# Altium PCB PCB1.PcbDoc
Units mm, origin at the board's own origin, x right, y up, seen from the top; angles counter-clockwise.
Board outline 40.64 x 65.6 mm, 2 copper layers (Top Layer, Bottom Layer); 64 components, 73 nets, 320 pads, 138 vias.
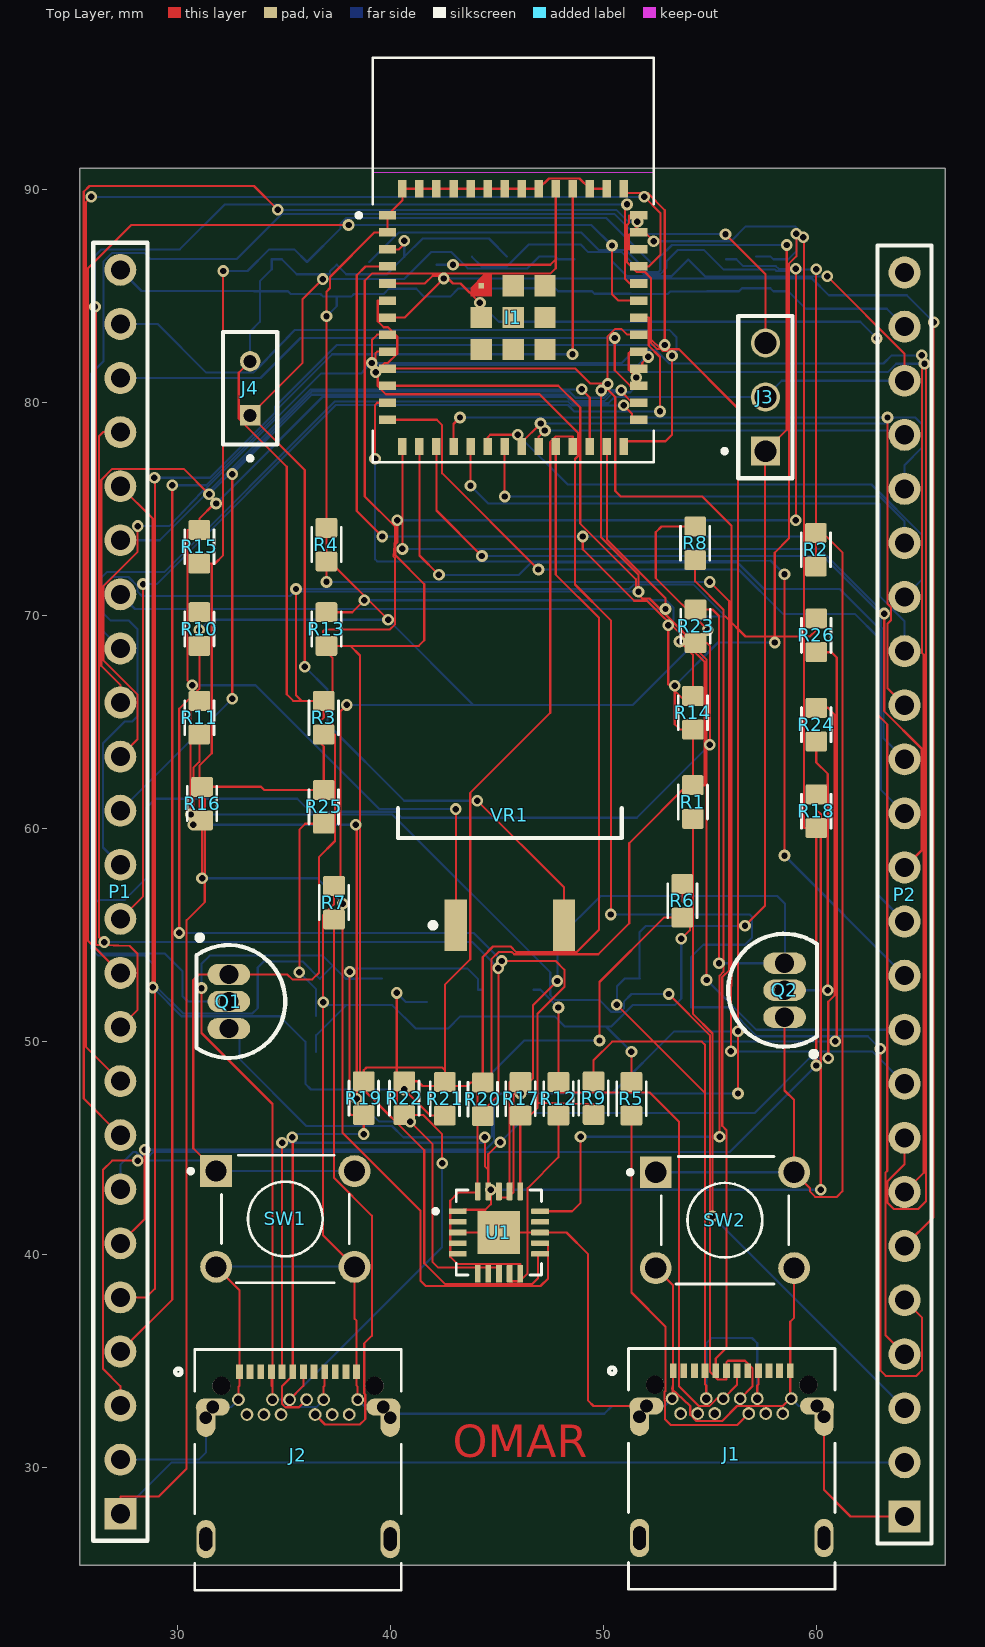
[diagram p0: Top Layer view]
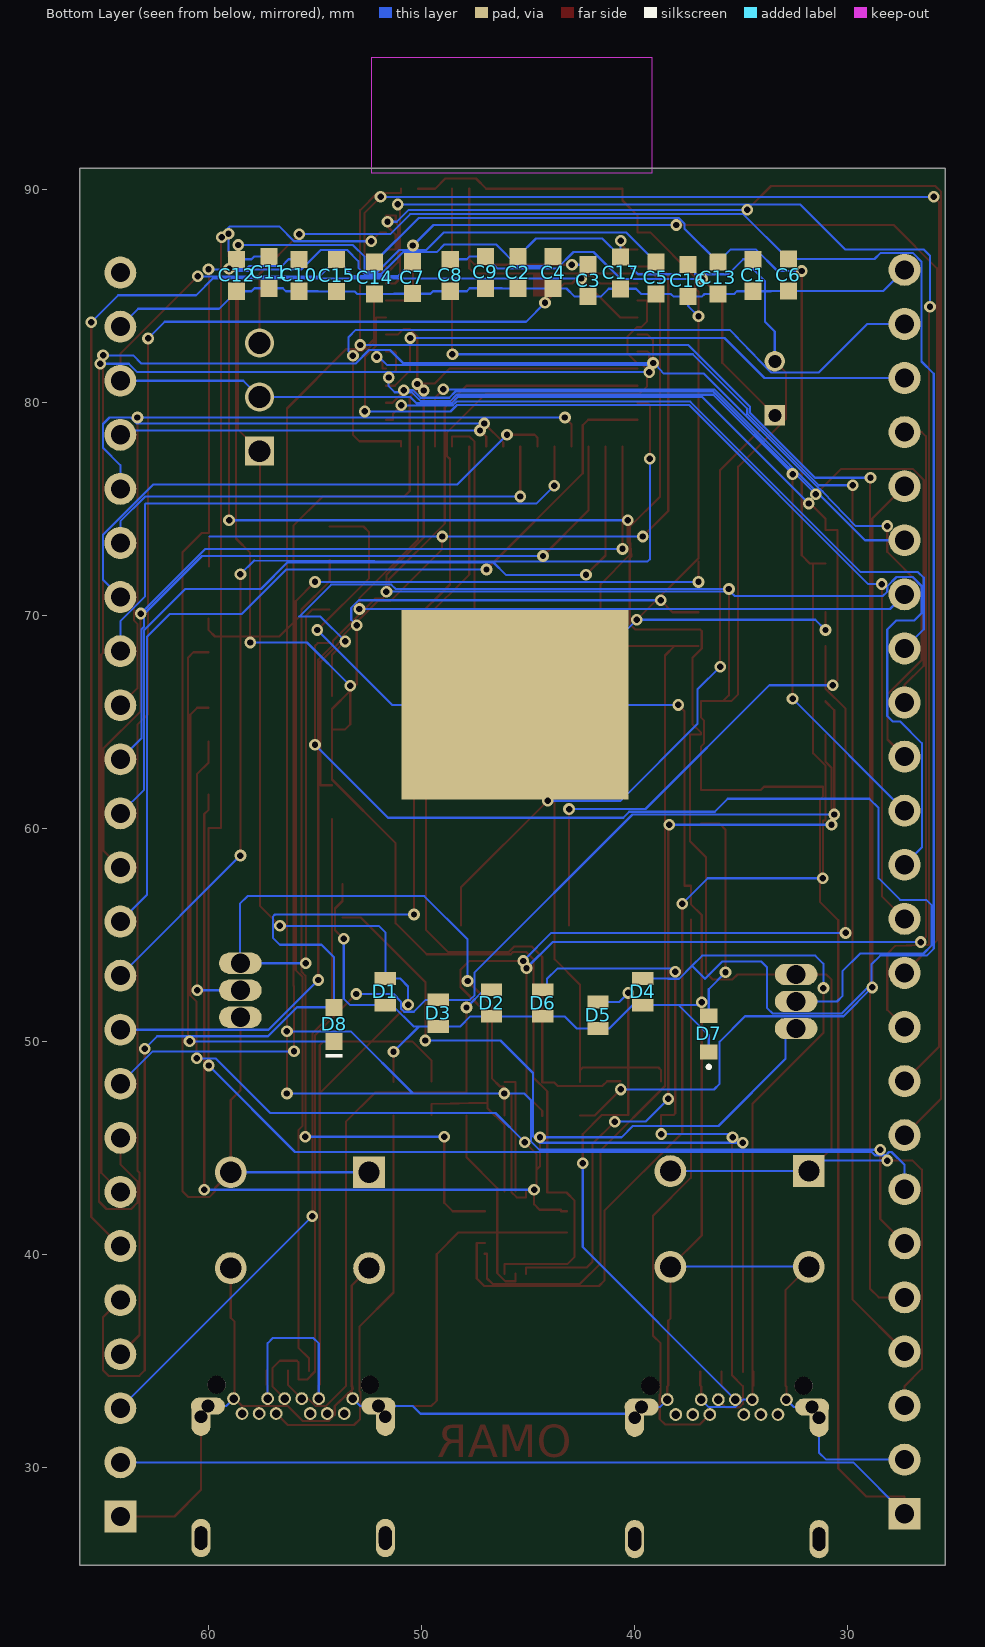
[diagram p1: Bottom Layer view, seen from below]
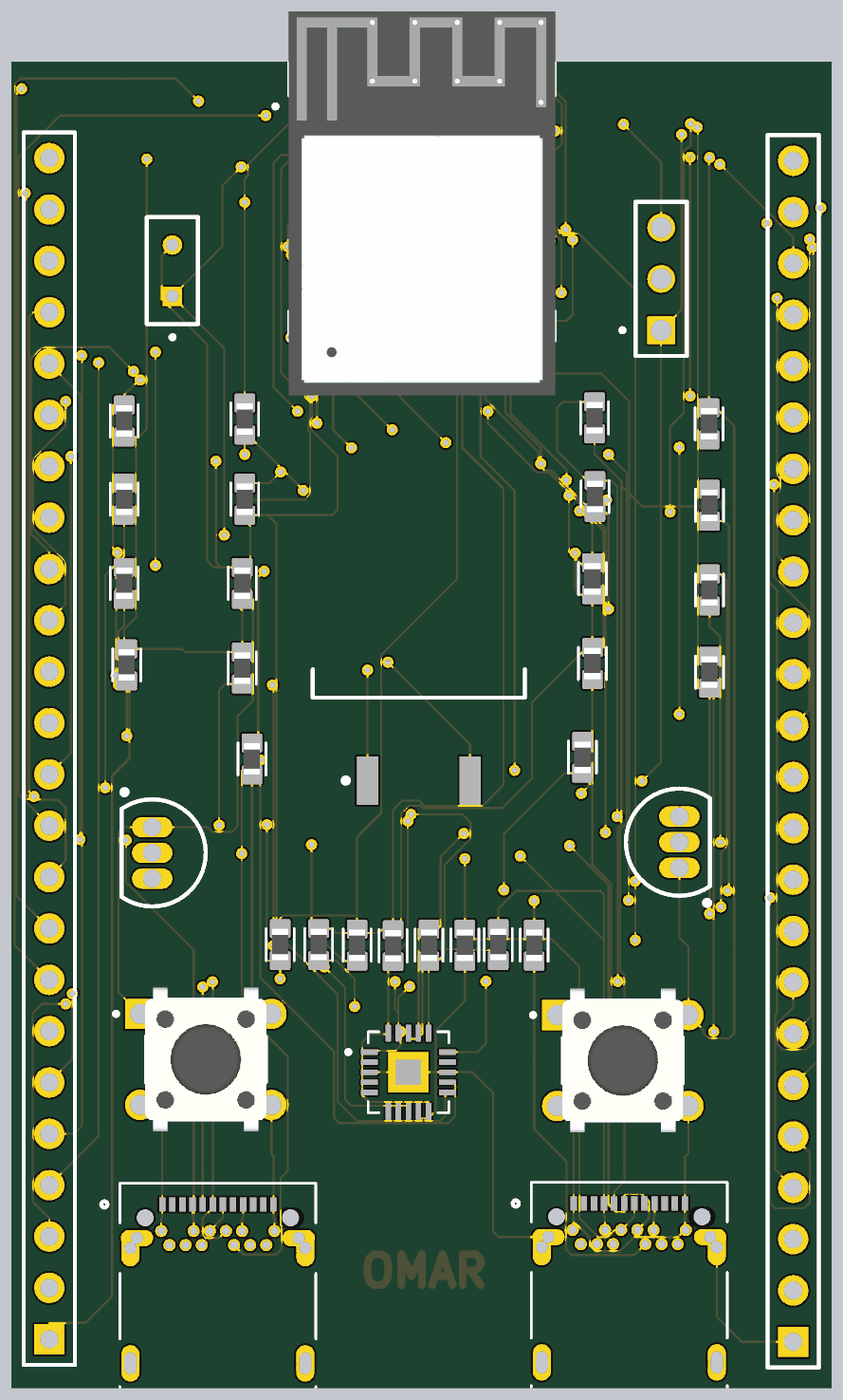
[diagram p2: 3D render of the assembled board from above, using the file's embedded part models]
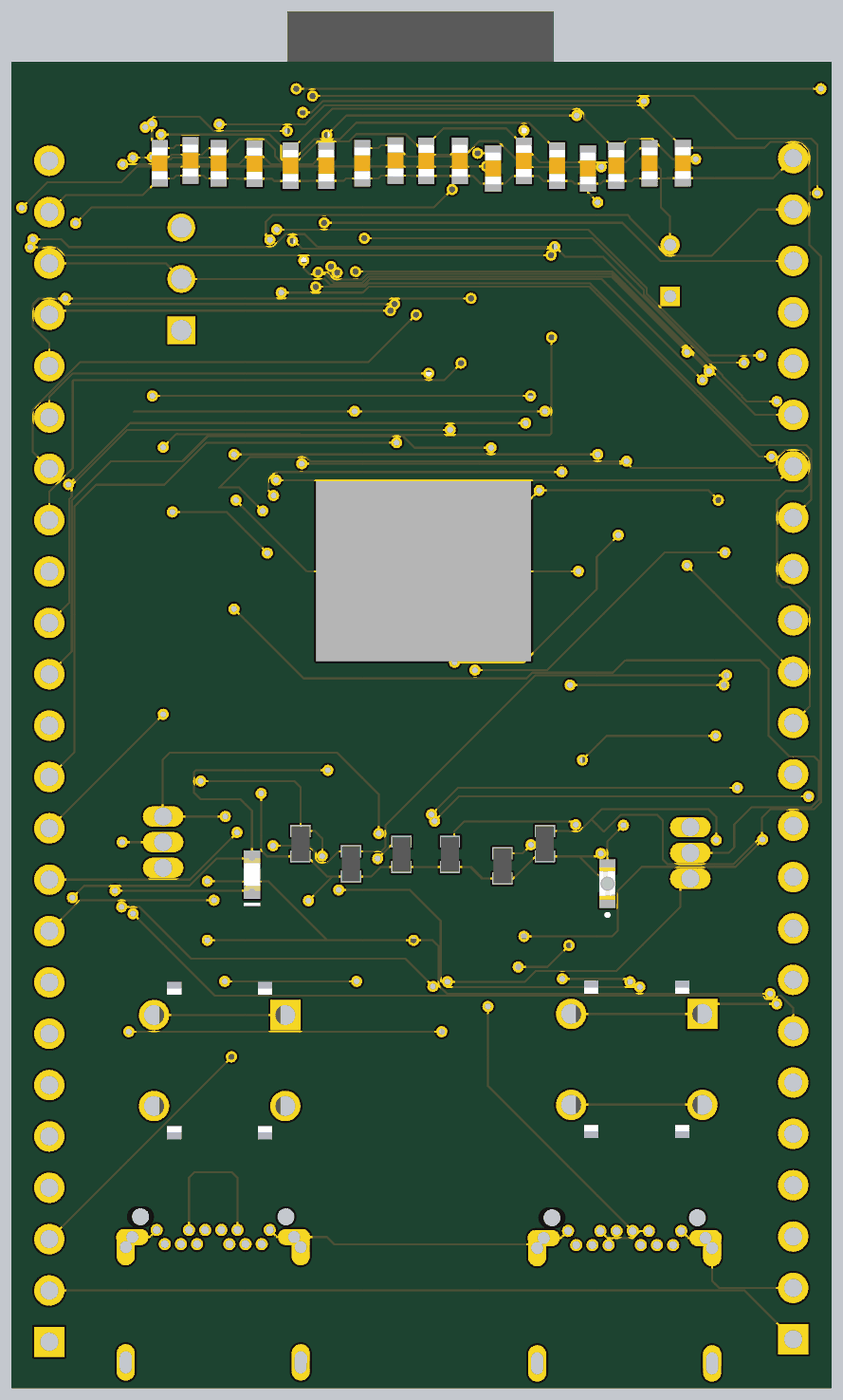
[diagram p3: 3D render of the assembled board from below, using the file's embedded part models]

## Layer stack, top to bottom
Top Solder: solder mask 0.0102, Solder Resist, Dk 3.5
Top Layer: signal copper 0.0356
Dielectric 1: dielectric 0.32, FR-4, Dk 4.8
Bottom Layer: signal copper 0.0356
Bottom Solder: solder mask 0.0102, Solder Resist, Dk 3.5

## Board outline
25.4,25.4 66.04,25.4 66.04,91 25.4,91

## Design rules (kind name [scope] priority, off if disabled: settings)
Clearance Clearance_1 [All] p1: gap=0 ignorepadtopadclearanceinfootprint=TRUE
Clearance [All] p2: gap=0 ignorepadtopadclearanceinfootprint=TRUE
Clearance Clearance_2 [All] p3: gap=0 ignorepadtopadclearanceinfootprint=TRUE
ComponentClearance [All] p1: gap=0 collisioncheckmode=3 verticalgap=0 showdistances=FALSE
DiffPairsRouting [All] p1: maxlimit=0.254 minlimit=0.05 mostfreqgap=0.05 toplayer_minwidth=0.1 toplayer_maxwidth=0.1 toplayer_prefwidth=0.1 bottomlayer_minwidth=0.1 bottomlayer_maxwidth=0.1 bottomlayer_prefwidth=0.1 maxuncoupledlength=12.7
PolygonConnect [All] p1: connectstyle=Relief reliefconductorwidth=0.254 reliefentries=4 polygonreliefangle="90 Angle" airgapwidth=0.254
RoutingCorners [All] p1: cornerstyle=Round minsetback=2 maxsetback=2
RoutingVias [All] p1: holewidth=0.3 width=0.55 viastyle="Through Hole" minholewidth=0.2 minwidth=0.5 maxholewidth=0.4 maxwidth=0.6
SolderMaskExpansion [All] p1: expansion=0.102 istentingtop=FALSE
Width [All] p1: maxlimit=0.15 minlimit=0.1 preferedwidth=0.1
27 further rules are at their usual default settings.

## Components (designator, comment, footprint, x,y, rotation, side; value= is the part's Value field where it differs from the comment)
C1 "10nF" WCAP-CSGP_0603_L1.6W0.8H0.8_Reflow 34.417,85.979 r90 bottom
C2 "100nF" WCAP-CSGP_0603_L1.6W0.8H0.8_Reflow 45.466,86.106 r90 bottom
C3 "1uF" WCAP-CSGP_0603_L1.6W0.8H0.8_Reflow 42.164,85.725 r90 bottom
C4 "100nF" WCAP-CSGP_0603_L1.6W0.8H0.8_Reflow 43.815,86.106 r90 bottom
C5 "100nF" WCAP-CSGP_0603_L1.6W0.8H0.8_Reflow 38.989,85.852 r90 bottom
C6 "100nF" WCAP-CSGP_0603_L1.6W0.8H0.8_Reflow 32.766,85.991 r90 bottom
C7 "4uF" WCAP-CSGP_0603_L1.6W0.8H0.8_Reflow 50.419,85.864 r90 bottom
C8 "10uF" WCAP-CSGP_0603_L1.6W0.8H0.8_Reflow 48.641,85.979 r90 bottom
C9 "10uF" WCAP-CSGP_0603_L1.6W0.8H0.8_Reflow 46.99,86.118 r90 bottom
C10 "100nF" WCAP-CSGP_0603_L1.6W0.8H0.8_Reflow 55.753,85.979 r90 bottom
C11 "100nF" WCAP-CSGP_0603_L1.6W0.8H0.8_Reflow 57.15,86.118 r90 bottom
C12 "100nF" WCAP-CSGP_0603_L1.6W0.8H0.8_Reflow 58.674,85.979 r90 bottom
C13 "100nF" WCAP-CSGP_0603_L1.6W0.8H0.8_Reflow 36.068,85.852 r90 bottom
C14 "4uF" WCAP-CSGP_0603_L1.6W0.8H0.8_Reflow 52.197,85.852 r90 bottom
C15 "100nF" WCAP-CSGP_0603_L1.6W0.8H0.8_Reflow 53.975,85.967 r90 bottom
C16 "100nF" WCAP-CSGP_0603_L1.6W0.8H0.8_Reflow 37.465,85.725 r90 bottom
C17 "100nF" WCAP-CSGP_0603_L1.6W0.8H0.8_Reflow 40.64,86.094 r90 bottom
D1 "TESDU12VRGG" DIO_TESDU12VRGG 51.7,52.325 r90 bottom
D2 "TESDU12VRGG" DIO_TESDU12VRGG 46.7,51.8 r90 bottom
D3 "TESDU12VRGG" DIO_TESDU12VRGG 49.2,51.325 r90 bottom
D4 "TESDU12VRGG" DIO_TESDU12VRGG 39.6,52.325 r90 bottom
D5 "TESDU12VRGG" DIO_TESDU12VRGG 41.7,51.225 r90 bottom
D6 "TESDU12VRGG" DIO_TESDU12VRGG 44.3,51.8 r90 bottom
D7 "Green" WL-SMCW_0603_150060xx83000 36.5,50.35 r90 bottom
D8 "Red" WL-SMCW_0603_150060xx75003 54.1,50.8 r90 bottom
I1 "IC" XCVR_ESP32-MINI-1-N4 45.752,83.993 r0 top
J1 "UJ31-CH-31N-SMT-TR" CUI_UJ31-CH-31N-SMT-TR 53.269,34.53 r0 top
J2 "UJ31-CH-31N-SMT-TR" CUI_UJ31-CH-31N-SMT-TR 32.9,34.482 r0 top
J3 "TSW-101-23-S-T" SAMTEC_TSW-101-23-S-T 57.6,77.72 r0 top
J4 "BBL-102-G-E" SAMTEC_BBL-102-G-E 33.4,79.4 r90 top
P1 "Header 24" HDR1X24 27.305,27.813 r90 top
P2 "Header 24" HDR1X24 64.135,27.686 r90 top
Q1 "NPN" TO-226-AA 32.4,51.87 r180 top
Q2 "NPN" TO-226-AA 58.5,52.4 r0 top
R1 "27R" RESC1608X50N_CPF0603F10KC1 54.194,61.238 r270 top
R2 "27R" RESC1608X50N_CPF0603F10KC1 59.969,73.09 r90 top
R3 "10K" RESC1608X50N_CPF0603F10KC1 36.857,65.202 r90 top
R4 "5K" RESC1608X50N_CPF0603F10KC1 36.984,73.33 r90 top
R5 "5K" RESC1608X50N_CPF0603F10KC1 51.308,47.306 r90 top
R6 "5K" RESC1608X50N_CPF0603F10KC1 53.7,56.6 r90 top
R7 "5K" RESC1608X50N_CPF0603F10KC1 37.338,56.515 r90 top
R8 "10K" RESC1608X50N_CPF0603F10KC1 54.3,73.39 r90 top
R9 "4K" RESC1608X50N_CPF0603F10KC1 49.53,47.334 r90 top
R10 "10K" RESC1608X50N_CPF0603F10KC1 31.015,69.365 r90 top
R11 "27R" RESC1608X50N_CPF0603F10KC1 31.015,65.202 r90 top
R12 "27R" RESC1608X50N_CPF0603F10KC1 47.879,47.306 r90 top
R13 "0R" RESC1608X50N_CPF0603F10KC1 36.984,69.365 r90 top
R14 "0R" RESC1608X50N_CPF0603F10KC1 54.194,65.429 r90 top
R15 "0R" RESC1608X50N_CPF0603F10KC1 31.015,73.231 r90 top
R16 "0R" RESC1608X50N_CPF0603F10KC1 31.142,61.166 r90 top
R17 "0R" RESC1608X50N_CPF0603F10KC1 46.101,47.306 r90 top
R18 "0R" RESC1608X50N_CPF0603F10KC1 59.99,60.811 r90 top
R19 "0R" RESC1608X50N_CPF0603F10KC1 38.735,47.334 r90 top
R20 "0R" RESC1608X50N_CPF0603F10KC1 44.323,47.278 r90 top
R21 "0R" RESC1608X50N_CPF0603F10KC1 42.545,47.306 r90 top
R22 "0R" RESC1608X50N_CPF0603F10KC1 40.64,47.334 r90 top
R23 "10K" RESC1608X50N_CPF0603F10KC1 54.321,69.493 r90 top
R24 "10K" RESC1608X50N_CPF0603F10KC1 59.99,64.875 r90 top
R25 "10K" RESC1608X50N_CPF0603F10KC1 36.857,61.011 r90 top
R26 "1K" RESC1608X50N_CPF0603F10KC1 59.99,69.066 r90 top
SW1 "1825910-6" SW_1825910-6-4 35.052,41.656 r0 top
SW2 "1825910-6" SW_1825910-6-4 55.7,41.6 r0 top
U1 "FT231XQ-R" QFN50P400X400X80-21N 45.085,41.021 r0 top
VR1 "Volt Reg" D2PAK_N 45.6,62.25 r90 top

## Footprints (in the part's own frame and the unit in brackets; to place one, negate y for a bottom-side part, rotate by r counter-clockwise, add the part's x,y. Pads: shape width x height; smd on the part's side, far side on the other; paste and mask are expansions set on the pad)
CUI_UJ31-CH-31N-SMT-TR [mm]
  rect 0.32x0.7 smd: A1(0,0) A2(0.5,0) A3(1,0) A4(1.5,0) A5(2,0) A6(2.5,0) A7(3,0) A8(3.5,0) A9(4,0) A10(4.5,0) A11(5,0) A12(5.5,0)
  round 0.6 hole 0.4: B1(5.55,-1.31) B2(5.15,-2.01) B3(4.35,-2.01) B4(3.95,-1.31) B5(3.55,-2.01) B6(3.15,-1.31) B7(2.35,-1.31) B8(1.95,-2.01) B9(1.55,-1.31) B10(1.15,-2.01) B11(0.35,-2.01) B12(-0.05,-1.31)
  oval 1.6x0.8 hole 0.6: SH1(-1.255,-1.66) SH2(6.755,-1.66)
  oval 0.9x1.8 hole 0.6: SH3(-1.58,-2.16) SH4(7.08,-2.16)
  oval 0.9x1.8 hole 0.6 slot 1.1 at 90 deg: SH5(-1.58,-7.86) SH6(7.08,-7.86)
  round 0.85 hole 0.85 unplated: ""(-0.85,-0.66) ""(6.35,-0.66)
  silkscreen extent -3.02,-10.26 7.6,1.04
D2PAK_N [mm] "D2-PAK, 4-Leads, Body 8.8x10.4mm, Pitch 2.54mm, Lead Span 15.1mm, IPC Medium Density"
  rect 2.4x1.05 smd: 1(-6.8,2.54) 3(-6.8,-2.54)
  rect 8.9x10.65 smd far side: 2(3.55,0)
  silkscreen extent -6.92,-5.25 -1.3,5.25, body extent -2.7,-5.28 6.3,5.28, height 4.69
DIO_TESDU12VRGG [mm]
  rect 0.6x1 smd: 1(-0.625,0) 2(0.625,0)
  body extent -0.85,-0.45 0.85,0.45, height 0.85
HDR1X24 [mm] "Connector; Header; 24 Position"
  rect 1.5x1.5 hole 0.9: 1(0,0)
  round 1.5 hole 0.9: 2(2.54,0) 3(5.08,0) 4(7.62,0) 5(10.16,0) 6(12.7,0) 7(15.24,0) 8(17.78,0) 9(20.32,0) 10(22.86,0) 11(25.4,0) 12(27.94,0) 13(30.48,0) 14(33.02,0) 15(35.56,0) 16(38.1,0) 17(40.64,0) 18(43.18,0) 19(45.72,0) 20(48.26,0) 21(50.8,0) 22(53.34,0) 23(55.88,0) 24(58.42,0)
  silkscreen extent -1.27,-1.27 59.69,1.27
QFN50P400X400X80-21N [mm]
  rrect25% 0.84x0.27 smd: 1(-1.935,1) 2(-1.935,0.5) 3(-1.935,0) 4(-1.935,-0.5) 5(-1.935,-1) 11(1.935,-1) 12(1.935,-0.5) 13(1.935,0) 14(1.935,0.5) 15(1.935,1)
  rrect25% 0.27x0.84 smd: 6(-1,-1.935) 7(-0.5,-1.935) 8(0,-1.935) 9(0.5,-1.935) 10(1,-1.935) 16(1,1.935) 17(0.5,1.935) 18(0,1.935) 19(-0.5,1.935) 20(-1,1.935)
  rect 2x2 smd paste-0.37: 21(0,0)
  silkscreen extent -3.07,-2 2,2
RESC1608X50N_CPF0603F10KC1 [mm]
  rrect20% 0.94x1.02 smd: 1(-0.79,0) 2(0.79,0)
  silkscreen extent -0.8,-0.69 0.8,0.69, body extent -0.77,-0.4 0.77,0.4, height 0.55
SAMTEC_BBL-102-G-E [mm]
  rect 0.96x0.96 hole 0.61: 01(0,0)
  round 0.96 hole 0.61: 02(2.54,0)
  silkscreen extent -2.12,-1.27 3.91,1.27
SAMTEC_TSW-101-23-S-T [mm]
  rect 1.37x1.37 hole 1.02: 01(0,0)
  round 1.37 hole 1.02: 02(0,2.54) 03(0,5.08)
  silkscreen extent -2.02,-1.27 1.27,6.35
SW_1825910-6-4 [mm]
  rect 1.498x1.498 / inner round 1.498 / far side rect 1.498x1.498 hole 0.99: 1(-3.25,2.25)
  round 1.498 hole 0.99: 2(3.25,2.25) 3(-3.25,-2.25) 4(3.25,-2.25)
  silkscreen extent -4.54,-3 3,3, body extent -3,-3.9 3,3.9, height 5.01
TO-226-AA [mm] "TO, Flat Index; 3 In-Line, Axial Leads; Body Dia. 4.8mm; Leads 0.55 x 0.51 mm (max)"
  oval 2x1 hole 0.9: 1(0,-1.27) 2(0,0) 3(0,1.27)
  silkscreen extent -2.65,-3.13 1.52,2.65, body extent -2.65,-2.66 1.52,2.66, height 5.33
WCAP-CSGP_0603_L1.6W0.8H0.8_Reflow [mm] "Ceramic Capacitors, body 1.6x0.8mm"
  rect 0.8x0.8 smd: 1(-0.75,0) 2(0.75,0)
  body extent -0.8,-0.4 0.8,0.4, height 0.8
WL-SMCW_0603_150060xx75003 [mm] "SMD Mono-color Chip LED, body 1.6x0.8mm"
  rect 0.8x0.8 smd: 1(-0.8,0) 2(0.8,0)
  silkscreen extent -1.55,-0.4 -1.4,0.4, body extent -0.8,-0.4 0.8,0.4, height 0.7
WL-SMCW_0603_150060xx83000 [mm] "LED, SMT, 2-leads, body 1.60 x 0.80 mm"
  rect 0.7x0.8 smd: 1(-0.85,0) 2(0.85,0)
  silkscreen extent -1.62,-0.07 -1.48,0.08, body extent -0.8,-0.4 0.8,0.4, height 0.95
XCVR_ESP32-MINI-1-N4 [mm]
  rect 0.8x0.4 smd: 1(-5.9,4.8) 2(-5.9,4) 3(-5.9,3.2) 4(-5.9,2.4) 5(-5.9,1.6) 6(-5.9,0.8) 7(-5.9,0) 8(-5.9,-0.8) 9(-5.9,-1.6) 10(-5.9,-2.4) 11(-5.9,-3.2) 12(-5.9,-4) 13(-5.9,-4.8) 28(5.9,-4.8) 29(5.9,-4) 30(5.9,-3.2) 31(5.9,-2.4) 32(5.9,-1.6) 33(5.9,-0.8) 34(5.9,0) 35(5.9,0.8) 36(5.9,1.6) 37(5.9,2.4) 38(5.9,3.2) 39(5.9,4) 40(5.9,4.8)
  rect 0.4x0.8 smd: 14(-5.2,-6.05) 15(-4.4,-6.05) 16(-3.6,-6.05) 17(-2.8,-6.05) 18(-2,-6.05) 19(-1.2,-6.05) 20(-0.4,-6.05) 21(0.4,-6.05) 22(1.2,-6.05) 23(2,-6.05) 24(2.8,-6.05) 25(3.6,-6.05) 26(4.4,-6.05) 27(5.2,-6.05) 41(5.2,6.05) 42(4.4,6.05) 43(3.6,6.05) 44(2.8,6.05) 45(2,6.05) 46(1.2,6.05) 47(0.4,6.05) 48(-0.4,6.05) 49(-1.2,6.05) 50(-2,6.05) 51(-2.8,6.05) 52(-3.6,6.05) 53(-4.4,6.05) 54(-5.2,6.05)
  rect 0.25x0.25 smd paste-1 mask+0: 55_1(-1.5,1.5)
  rect 1x1 smd: 55_2(0,1.5) 55_3(1.5,1.5) 55_4(-1.5,0) 55_5(0,0) 55_6(1.5,0) 55_7(-1.5,-1.5) 55_8(0,-1.5) 55_9(1.5,-1.5)
  Top Layer region: -1,1 -2,1 -2,1.4 -1.4,2 -1,2
  Keep-Out Layer region: 6.6,6.8 -6.6,6.8 -6.6,12.2 6.6,12.2
  silkscreen extent -7.35,-6.8 6.6,12.2, body extent -6.6,-9.5 6.6,9.5, height 2.55

## Part data
C1 C2 C3 C4 C5 C6 C7 C8 C9 C10 C11 C12 C13 C14 C15 C16 C17: library part 885012106029, "WCAP-CSGP Multilayer Ceramic Chip Capacitor, General Purpose, size 0603, X5R, 2.2μF, 16V", Capacitance=2.2μF, Capacitance Tolerance=+/-10%, Case/Size Code=0603, Insulation Resistance=0.05GΩ, Manufacturer="Wurth Elektronik", Max Operating Temperature=85°C, Min Operating Temperature=-55°C, Rated Voltage (DC)=16V, Category="Multilayer Ceramic Chip Capacitors", Ceramic Type=X5R, ComponentLink1Description="Website Link", ComponentLink1URL=https://www.we-online.com/redexpert/article/885012106029?ad, ComponentLink2Description="Datasheet Link", ComponentLink2URL=https://www.we-online.com/redexpert/spec/885012106029?ad, Dissipation Factor=10%, Height=0.8mm, Length=1.6mm, Manufacturer Part Number=885012106029, Match Code=WCAP-CSGP, Mount="Surface Mount", Packaging="Tape and Reel", Technical Reference=X5R0603225K016DFCT10000, Width=0.8mm
D1 D2 D3 D4 D5 D6: "33V Clamp 5A Ipp Tvs Diode Surface Mount 0603", Package="0603 Taiwan Semiconductor", Check_prices=https://www.snapeda.com/parts/TESDU12VRGG/taiwan/view-part/?ref=eda, MF="Taiwan Semiconductor", MP=TESDU12VRGG, SnapEDA_Link=https://www.snapeda.com/parts/TESDU12VRGG/taiwan/view-part/?ref=snap
D7: library part 150060GS83000, "WL-SMCW Mono-color Chip LED Waterclear, SMT, size 0603, Green, 3.3V, 30°", Case/Size Code=0603, Forward Voltage=3.3V, Manufacturer="Wurth Elektronik", Operating Temperature Max=85°C, Operating Temperature Min=-40°C, Category="Signal LEDs", Chip Technology=InGaN, ComponentLink1Description="Website Link", ComponentLink1URL=https://www.we-online.com/redexpert/article/150060GS83000?ad, ComponentLink2Description="Datasheet Link", ComponentLink2URL=https://www.we-online.com/redexpert/spec/150060GS83000?ad, Dominant Wavelength=525nm, Emitting Color=Green, Height=0.95mm, Length=1.6mm, Luminous Intensity=4500mcd, Manufacturer Part Number=150060GS83000, Match Code=WL-SMCW, Mount="Surface Mount", Packaging="Tape and Reel", Peak Wavelength=520nm, Viewing Angle=30°, Width=0.8mm
D8: library part 150060RS75003, "WL-SMCW Mono-color Chip LED Waterclear, SMT, size 0603, Red, 2V, 140°", Case/Size Code=0603, Forward Voltage=2V, Manufacturer="Wurth Elektronik", Operating Temperature Max=100°C, Operating Temperature Min=-40°C, Category="Signal LEDs", Chip Technology=AlInGaP, ComponentLink1Description="Website Link", ComponentLink1URL=https://www.we-online.com/redexpert/article/150060RS75003?ad, ComponentLink2Description="Datasheet Link", ComponentLink2URL=https://www.we-online.com/redexpert/spec/150060RS75003?ad, Dominant Wavelength=625nm, Emitting Color=Red, Height=0.7mm, Length=1.6mm, Luminous Intensity=530mcd, Manufacturer Part Number=150060RS75003, Match Code=WL-SMCW, Mount="Surface Mount", Packaging="Tape and Reel", Peak Wavelength=630nm, Viewing Angle=140°, Width=0.8mm
I1: library part Component_1
J1 J2: "Type C, USB 3.1 Gen 2, 5 A, Right Angle, Surface Mount (SMT), USB Receptacle", Package=None, Availability="In Stock", Check_prices=https://www.snapeda.com/parts/UJ31-CH-31N-SMT-TR/CUI+Devices/view-part/?ref=eda, CUI_purchase_URL=https://www.cuidevices.com/product/interconnect/connectors/usb-connectors/uj31-ch-smt-series?utm_source=snapeda.com&utm_medium=referral&utm_campaign=snapedaBOM, MF="CUI Devices", MP=UJ31-CH-31N-SMT-TR, Price=None, Purchase-URL=https://pricing.snapeda.com/search/part/UJ31-CH-31N-SMT-TR/?ref=eda, SnapEDA_Link=https://www.snapeda.com/parts/UJ31-CH-31N-SMT-TR/CUI+Devices/view-part/?ref=snap
J3 J4: Package=None, Availability=Unavailable, Price=None
  J3: MP=TSW-101-23-S-T
  J4: MP=BBL-102-G-E
P1 P2: "Header, 24-Pin", LatestRevisionDate=17-Jul-2002, LatestRevisionNote="Re-released for DXP Platform.", Publisher="Altium Limited"
Q1 Q2: "NPN Bipolar Transistor", Code_JEDEC=TO-226-AA, LatestRevisionDate=17-Jul-2002, LatestRevisionNote="Re-released for DXP Platform.", PackageDescription="TO, Flat Index; 3 In-Line, Axial Leads; Body Dia. 4.8mm; Leads 0.55 x 0.51 mm (max)", PackageReference=TO-226-AA, Published=8-Jun-2000, Publisher="Altium Limited"
R1 R2 R4 R5 R6 R7 R9 R11 R12 R13 R14 R15 R16 R17 R18 R19 R20 R21 R22 R26: library part CPF0603F10KC1, "Res Thin Film 0603 10K Ohm 1% 1/16W Â±50ppm/Â°C Molded SMD SMD Paper T/R", Package=0603, Power_Rating=".063 W", Resistance=10K, Tolerance=1%, Voltage_Rating="50 V", Availability="In Stock", Check_prices=https://www.snapeda.com/parts/CPF0603F10KC1/TE+Connectivity+Passive+Product/view-part/?ref=eda, EU_RoHS_Compliance=Compliant, MF="TE Connectivity", MP=CPF0603F10KC1, Price=None, Purchase-URL=https://pricing.snapeda.com/search/part/CPF0603F10KC1/?ref=eda, SnapEDA_Link=https://www.snapeda.com/parts/CPF0603F10KC1/TE+Connectivity+Passive+Product/view-part/?ref=snap
R3 R8 R10 R23 R24 R25: library part CPF0603F10KC1, "Res Thin Film 0603 10K Ohm 1% 1/16W Â±50ppm/Â°C Molded SMD SMD Paper T/R", Package=0603, Power_Rating=".063 W", Tolerance=1%, Voltage_Rating="50 V", Availability="In Stock", Check_prices=https://www.snapeda.com/parts/CPF0603F10KC1/TE+Connectivity+Passive+Product/view-part/?ref=eda, EU_RoHS_Compliance=Compliant, MF="TE Connectivity", MP=CPF0603F10KC1, Price=None, Purchase-URL=https://pricing.snapeda.com/search/part/CPF0603F10KC1/?ref=eda, Resistance=10K, SnapEDA_Link=https://www.snapeda.com/parts/CPF0603F10KC1/TE+Connectivity+Passive+Product/view-part/?ref=snap
SW1 SW2: "Switch Push Button OFF (ON) SPST Round Button 0.05A 24VDC Momentary Contact PC Pins Thru-Hole", Package=None, Check_prices=https://www.snapeda.com/parts/1825910-6/TE+Connectivity+ALCOSWITCH+Switches/view-part/?ref=eda, Digi-Key_Part_Number=450-1650-ND, MF="TE Connectivity", MP=1825910-6, Purchase-URL=https://pricing.snapeda.com/search/part/1825910-6/?ref=eda, SnapEDA_Link=https://www.snapeda.com/parts/1825910-6/TE+Connectivity+ALCOSWITCH+Switches/view-part/?ref=snap
U1: "USB2.0 Full Speed IC offers a compact bridge to full handshake UART Interface", Package=None, Availability=Unavailable, MP=FT231XQ-R, Price=None
VR1: "Voltage Regulator", LatestRevisionDate=29-May-2009, LatestRevisionNote="IPC-7351 Footprint Added.", PackageDescription="3-Pin Transistor Outline Package 2.54 mm Pitch, 15.1 mm Lead Span", PackageReference=D2PAK, Published=24-Mar-1999, Publisher="Altium Limited"

## Via types
v1: diameter 0.55, hole 0.3, Top Layer to Bottom Layer, 138 vias

## Nets (pads, with @x,y where several pads share a name; then routed paths per layer and width w, separated by ;. In a path a pad name is that pad's centre, name@x,y a point inside that pad or via, vN(x,y) a via of type N, cw(c..) or ccw(c..) an arc to the next point about the centre after c; other vN are vias at no path point)
+3V3: C1.2 C2.2 C16.2 C17.2 I1.3 J4.02 P1.1 P2.2 R3.2 R14.2 R16.2 R25.2 R26.2 | length 160.3
  Top Layer w0.1: P1.1 27.305,28.626 29.108,28.626 30.418,29.936 30.418,55.691 31.267,56.54 31.267,61.368 31.142,61.493 R16.2 33.909,61.956 34.064,61.801 R25.2 36.857,63.856 36.728,63.984 36.728,65.075 36.857,65.203 R3.2 35.814,65.992 ; J4.02 32.868,81.408 32.868,79.248 35.123,76.993 35.123,66.294 35.425,65.992 35.814,65.992 ; v1(35.554,71.247) 35.554,66.252 35.814,65.992 ; I1.3 40.386,87.193 40.64,87.447 v1(40.64,87.605) ; v1(53.569,68.783) 54.194,68.158 R14.2 ; 55.733,69.946 56.667,69.012 59.69,69.012 59.99,69.312 R26.2
  Bottom Layer w0.1: P1.1 29.718,30.226 P2.2 ; J4.02 33.4,83.336 33.858,83.795 33.858,85.7 34.417,86.258 C1.2 34.886,86.729 35.585,86.03 37.15,86.03 37.15,86.16 C16.2 37.91,86.03 39.826,86.03 C17.2 ; v1(35.554,71.247) 51.206,71.247 51.41,71.45 54.229,71.45 55.733,69.946 54.732,69.946 v1(53.569,68.783) ; v1(40.64,87.605) C17.2 ; C2.2 44.616,87.706 41.502,87.706 C17.2
"+3V3 REG": C8.2 C9.2 J4.01 VR1.3 | length 52.8
  Top Layer w0.1: v1(35.966,67.589) 35.966,76.834 J4.01 35.865,81.865 35.865,84.861 v1(36.805,85.801) ; v1(44.069,61.3) 48.14,57.229 VR1.3
  Bottom Layer w0.1: v1(35.966,67.589) 37.033,66.523 37.033,64.907 40.64,61.3 v1(44.069,61.3) ; v1(36.805,85.801) 40.64,85.801 41.91,87.071 42.853,87.071 43.618,86.306 46.428,86.306 C9.2 47.727,86.868 47.866,86.729 C8.2
+5V: C7.2 C15.2 J3.02 P2.22 R15.2 VR1.1 | length 82.2
  Top Layer w0.1: v1(30.683,66.726) 30.455,66.954 30.455,74.021 R15.2 31.015,74.549 31.726,75.26 v1(31.801,75.26) ; VR1.1 v1(43.06,60.909) ; v1(60.503,85.928) 64.135,82.296 P2.22
  Bottom Layer w0.1: v1(30.683,66.726) 33.655,66.726 39.472,60.909 v1(43.06,60.909) ; v1(31.801,75.26) 36.801,80.26 48.282,80.26 48.573,79.969 50.226,79.969 50.517,80.26 J3.02 58.366,81.026 P2.22 ; C7.2 51.102,85.931 53.189,85.931 C15.2 54.764,85.928 v1(60.503,85.928)
"+5V VBUS1": C5.2 D1.2 J1.A4 J1.A9 J1.B4 J1.B9 J3.01 R9.2 | length 102.3
  Top Layer w0.1: R9.2 49.53,49.108 50.41,49.987 52.349,49.987 ; v1(50.622,51.714) 52.349,49.987 ; J1.B9 54.819,33.833 54.769,33.883 J1.A4 54.769,47.568 ; v1(56.642,55.423) 57.582,56.363 57.582,77.72 J3.01 58.605,78.725 v1(58.605,87.401) ; J1.B4 57.219,33.833 57.269,33.883 J1.A9 ; 52.349,49.987 54.769,47.568 ; 52.349,49.987 54.61,49.987 54.769,49.828 54.769,47.568
  Bottom Layer w0.1: C5.2 40.373,87.986 48.946,87.986 49.767,87.164 51.037,87.164 52.07,86.131 52.578,86.131 52.661,86.214 52.661,86.849 53.213,87.401 v1(58.605,87.401) ; v1(50.622,51.714) 50.622,52.578 50.994,52.95 D1.2@51.689,52.95 ; D1.2 D1.2@51.689,52.95 ; J1.B9 54.819,35.814 55.073,36.068 56.972,36.068 57.219,35.821 J1.B4 ; v1(56.642,55.423) 51.994,55.423 51.689,55.118 D1.2@51.689,52.95
"+5V VBUS2": C6.2 D4.2 J2.A4 J2.A9 J2.B4 J2.B9 J3.03 | length 120.7
  Top Layer w0.1: v1(31.115,52.502) 31.115,50.394 34.45,47.059 34.45,33.782 ; J2.A4 34.4,33.832 34.45,33.782 ; J2.B9 34.45,33.782 ; J2.B4 36.85,33.782 36.9,33.832 J2.A9 ; v1(55.728,87.909) 57.6,86.037 J3.03
  Bottom Layer w0.1: v1(31.115,52.502) 31.115,53.645 31.496,54.026 36.805,54.026 37.287,53.543 ; J2.B9 34.9,33.172 35.25,32.822 36.093,32.822 36.5,32.822 J2.B4 ; D4.2 38.416,52.95 38.405,52.939 37.892,52.939 37.287,53.543 ; v1(55.728,87.909) 51.46,87.909 50.521,88.849 34.874,88.849 C6.2 28.715,86.741 28.423,87.033 26.924,87.033 26.505,86.614 26.505,81.928 25.933,81.356 25.933,54.356 26.264,54.026 28.448,54.026 28.854,53.619 28.854,52.705 30.251,51.308 33.503,51.308 33.757,51.562 33.757,53.467 34.036,53.746 35.865,53.746 36.678,52.934 37.287,53.543
"+VCC FTDI": C13.2 C14.2 R15.1 R16.1 U1.12 | length 87
  Top Layer w0.1: R15.1 31.598,72.441 ; v1(31.142,57.658) R16.1 31.013,60.376 31.013,62.941 31.598,63.525 31.598,72.441 ; v1(32.131,86.182) 32.131,72.822 31.75,72.441 31.598,72.441 ; v1(37.744,56.464) 37.744,45.695 41.402,42.037 41.402,38.76 41.656,38.506 47.041,38.506 47.396,38.862 47.396,40.521 U1.12
  Bottom Layer w0.1: v1(31.142,57.658) 36.551,57.658 v1(37.744,56.464) ; v1(32.131,86.182) 33.274,86.182 34.29,87.198 35.472,87.198 C13.2 37.638,88.172 37.638,88.392 37.917,88.671 50.128,88.671 C14.2
"BTN GPIO0": C4.2 Q2.1 R2.2 SW2.1 SW2.2 | length 79.4
  Top Layer w0.1: Q2.1 58.5,47.694 58.95,47.244 SW2.2 59.69,43.11 59.69,42.951 59.944,42.697 60.96,42.697 61.214,42.951 61.214,72.966 60.3,73.88 R2.2 59.969,86.233 v1(59.995,86.258)
  Bottom Layer w0.1: C4.2 44.265,86.406 45.466,86.406 46.487,87.427 48.92,87.427 49.283,87.064 50.858,87.064 51.891,86.031 52.661,86.031 52.958,86.328 52.958,86.638 53.492,87.173 54.712,87.173 55.626,86.258 58.044,86.258 58.124,86.179 59.224,86.179 59.304,86.258 v1(59.995,86.258) ; SW2.1 SW2.2
CHIP_PU: C3.2 I1.45 P1.3 Q1.1 R3.1 SW1.1 SW1.2 | length 95.4
  Top Layer w0.1: P1.3 27.305,33.807 26.492,34.62 26.492,43.967 26.924,44.399 v1(28.118,44.399) ; SW1.1 30.731,44.977 30.731,52.886 30.986,53.14 Q1.1 35.15,53.14 35.382,52.908 36.322,52.908 36.627,53.213 36.627,58.649 37.389,59.411 37.389,64.412 R3.1 36.857,64.491 37.262,64.895 37.262,68.021 36.83,68.453 36.83,69.266 36.906,69.342 39.954,69.342 40.208,69.596 40.208,72.702 40.127,72.783 40.208,73.552 40.208,74.168 38.786,75.59 38.786,85.725 39.116,86.055 47.498,86.055 47.752,86.309 47.752,86.729 ; v1(42.926,86.475) 47.498,86.475 47.752,86.729 ; I1.45 47.752,86.729
  Bottom Layer w0.1: v1(28.118,44.399) 31.309,44.399 SW1.1 SW1.2 ; C3.2 v1(42.926,86.475)
"CON1 USB N": D2.2 J1.A7 J1.B7 R12.2 | length 28.4
  Top Layer w0.1: v1(47.879,51.587) R12.2 47.879,47.6 52.172,47.6 53.543,46.228 53.543,33.807 54.483,32.868 54.962,32.868 55.314,33.22 J1.B7 56.269,33.87 J1.A7
  Bottom Layer w0.1: D2.2 47.041,52.425 v1(47.879,51.587)
"CON1 USB P": D3.2 J1.A6 J1.B6 R11.2 | length 56.3
  Top Layer w0.1: v1(30.607,60.655) 30.607,65.556 31.015,65.964 R11.2 ; v1(53.061,52.222) 54.991,50.292 54.991,34.493 55.372,34.112 55.769,34.112 J1.A6 55.769,34.925 55.845,35.001 56.642,35.001 56.998,34.646 56.998,33.799 J1.B6
  Bottom Layer w0.1: v1(30.607,60.655) 40.081,60.655 47.498,53.238 47.498,52.172 47.72,51.95 D3.2 49.79,51.95 50.35,51.389 50.805,51.389 50.952,51.537 50.952,51.867 51.308,52.222 v1(53.061,52.222)
"CON2 USB N": D5.2 J2.A7 J2.B7 R22.1 | length 26.8
  Top Layer w0.1: J2.B7 35.9,33.822 J2.A7 ; v1(40.284,52.273) 40.284,46.544 R22.1 41.518,46.544 42.418,45.644 v1(42.418,44.272)
  Bottom Layer w0.1: J2.B7 42.418,40.34 v1(42.418,44.272) ; v1(40.284,52.273) 40.708,51.85 D5.2
"CON2 USB P": D6.2 J2.A6 J2.B6 R19.1 | length 32.8
  Top Layer w0.1: v1(35.382,45.491) 35.4,45.474 J2.A6 35.4,34.308 34.9,33.807 34.9,32.974 35.057,32.817 35.695,32.817 J2.B6 ; v1(38.075,53.264) 38.075,46.609 38.14,46.544 R19.1 v1(38.735,45.644)
  Bottom Layer w0.1: v1(35.382,45.491) 35.535,45.644 v1(38.735,45.644) ; v1(38.075,53.264) 38.227,53.416 43.613,53.416 44.094,52.935 44.094,52.425 D6.2
"CON ESP USB N": P1.21 R20.1 | length 51.2
  Top Layer w0.1: v1(26.543,54.661) 26.305,54.899 26.305,78.426 26.492,78.613 P1.21 ; R20.1 44.323,46.736 45.06,47.473 v1(45.06,53.442)
  Bottom Layer w0.1: v1(26.543,54.661) 43.84,54.661 v1(45.06,53.442)
"CON ESP USB P": P1.20 R21.1 | length 41.5
  Top Layer w0.1: P1.20 28.824,74.554 v1(28.824,52.532) ; v1(40.634,47.741) 41.859,46.516 R21.1
  Bottom Layer w0.1: v1(28.824,52.532) 30.175,51.181 34.798,51.181 35.992,49.987 35.992,48.006 36.257,47.741 v1(40.634,47.741)
"CON GPIO0": P2.3 R1.2 | length 31.8
  Top Layer w0.1: R1.2 54.194,51.292 55.118,50.368 v1(55.118,41.783)
  Bottom Layer w0.1: v1(55.118,41.783) P2.3
"DTR FTDI": Q2.3 R23.2 U1.18 | length 49
  Top Layer w0.1: U1.18 45.085,42.672 45.517,42.672 45.771,42.926 45.771,47.498 46.152,47.879 46.304,47.879 46.685,48.26 46.685,51.689 v1(47.828,52.832) ; R23.2 55.118,70.283 55.423,69.978 v1(55.423,53.67)
  Bottom Layer w0.1: v1(47.828,52.832) 47.828,54.789 49.859,56.82 58.166,56.82 58.522,56.464 58.522,53.67 Q2.3 v1(55.423,53.67)
ESP_USB_N: I1.23 R20.2 R22.2 | length 39.5
  Top Layer w0.1: R22.2 41.275,48.124 41.495,47.904 43.601,47.904 43.764,48.068 R20.2 44.323,53.964 44.809,54.451 45.642,54.451 45.903,54.19 48.729,54.19 49.784,55.245 49.784,69.887 47.752,71.919 I1.23
ESP_USB_P: I1.24 R19.2 R21.2 | length 38.2
  Top Layer w0.1: R19.2 38.735,48.641 38.862,48.768 42.418,48.768 42.545,48.641 ; R21.2 42.545,48.641 ; I1.24 48.552,78.41 47.752,78.41 47.498,78.156 47.498,65.43 43.739,61.671 43.739,53.848 42.545,52.654 42.545,48.641
GND: C1.1 C2.1 C3.1 C4.1 C5.1 C6.1 C7.1 C8.1 C9.1 C10.1 C11.1 C12.1 C13.1 C14.1 C15.1 C16.1 C17.1 D1.1 D2.1 D3.1 D4.1 D5.1 D6.1 D7.1 I1.1 I1.2 I1.42 I1.43 I1.46 I1.47 I1.48 I1.49 I1.50 I1.51 I1.52 I1.53 I1.54 J1.A1 J1.A12 J1.B1 J1.B12 J1.SH1 J1.SH2 J1.SH3 J1.SH4 J2.A1 J2.A12 J2.B1 J2.B12 J2.SH1 J2.SH2 J2.SH3 J2.SH4 P1.2 P1.24 P2.1 P2.23 R4.2 R5.2 R6.2 R7.2 R8.2 R10.2 SW1.3 SW1.4 SW2.3 SW2.4 U1.3 U1.13 U1.21 VR1.2 | length 261.7
  Top Layer w0.1: v1(31.015,69.317) R10.2 ; J2.SH3 31.32,32.385 31.645,32.71 J2.SH1 ; SW1.3 32.9,38.308 J2.A1 32.9,33.832 32.85,33.782 J2.B12 ; v1(37.936,65.8) 37.643,65.507 37.643,57.305 R7.2 37.338,56.439 36.83,55.931 v1(36.83,51.841) 36.83,40.878 SW1.4 38.302,36.979 38.4,36.881 J2.A12 38.4,33.832 38.45,33.782 J2.B1 ; J2.SH2 39.655,32.71 39.98,32.385 J2.SH4 ; v1(39.88,69.799) 36.984,72.695 R4.2 v1(36.984,84.049) 36.984,85.213 37.15,85.38 37.15,85.9 39.243,87.993 I1.2 I1.1 40.552,89.493 I1.54 I1.53 I1.52 I1.51 I1.50 I1.49 I1.48 I1.47 I1.46 47.435,90.526 48.869,90.526 I1.43 I1.42 ; U1.3 U1.21 U1.13 48.26,41.021 49.276,40.005 49.276,33.124 49.53,32.87 J1.SH1 52.014,32.761 51.689,32.436 J1.SH3 ; R5.2 v1(51.308,49.505) ; SW2.3 53.269,38.531 J1.A1 53.269,33.883 ; J1.B12 53.251,33.64 ; v1(53.645,54.813) 54.051,55.22 54.051,56.24 53.7,56.591 R6.2 ; R8.2 52.717,74.18 52.451,73.914 52.451,71.755 v1(54.889,69.317) ; J1.B1 J1.B1@58.769,33.22 ; SW2.4 58.95,37.011 58.769,36.83 J1.A12 J1.B1@58.769,33.22 ; J1.SH2 60.024,32.761 60.349,32.436 J1.SH4 60.349,28.932 61.595,27.686 P2.1 ; 53.251,33.64 53.444,33.459 54.069,32.87 54.069,32.457 54.356,32.17 55.569,32.17 56.269,32.87 58.42,32.87 J1.B1@58.769,33.219 ; 53.251,33.64 53.219,33.67 53.269,33.883 ; 53.251,33.64 53.269,33.883
  Bottom Layer w0.1: P1.2 30.988,30.353 31.32,30.685 J2.SH3 ; P1.24 28.297,85.241 C6.1 33.579,85.241 33.591,85.229 C1.1 35.179,85.229 35.306,85.102 C13.1 36.703,85.102 36.83,84.975 C16.1 ; v1(31.015,69.317) 31.498,69.799 v1(39.88,69.799) VR1.2@43.879,65.8 ; J2.SH1 32.5,32.822 J2.B12 ; SW1.3 31.817,39.421 38.287,39.421 SW1.4 ; D7.1 36.5,50.292 37.908,51.7 ; v1(36.83,51.841) 36.971,51.7 37.908,51.7 ; v1(36.984,84.049) 37.465,84.53 C16.1 ; v1(37.936,65.8) VR1.2@43.879,65.8 ; J2.B1 38.8,32.822 J2.SH2 ; J2.SH4 39.98,32.512 50.038,32.512 50.396,32.87 J1.SH1 52.869,32.87 J1.B12 ; v1(51.308,49.505) 50.113,50.7 ; v1(53.645,54.813) 53.645,52.005 53.34,51.7 D1.1 51.358,51.7 50.358,50.7 50.113,50.7 ; v1(54.889,69.317) 51.373,65.8 VR1.2 VR1.2@43.879,65.8 ; J1.B1 59.169,32.87 J1.SH2 ; P2.23 63.297,84.404 59.499,84.404 C12.1 57.975,85.229 57.836,85.368 C11.1 56.502,85.368 56.363,85.229 C10.1 54.851,85.229 54.839,85.217 C15.1 53.125,85.217 53.01,85.102 C14.1 51.295,85.102 51.283,85.114 C7.1 49.569,85.114 49.454,85.229 C8.1 47.866,85.229 47.727,85.368 C9.1 46.215,85.368 46.203,85.356 C2.1 C4.1 43.18,85.356 42.799,84.975 C3.1 41.568,84.975 41.199,85.344 C17.1 39.917,85.344 39.675,85.102 C5.1 38.278,85.102 38.151,84.975 C16.1 ; 37.908,51.7 D4.1 40.081,51.7 41.181,50.6 D5.1 42.697,50.6 43.272,51.175 D6.1 D2.1 47.701,51.175 48.176,50.7 D3.1 50.113,50.7
GPIO0: I1.4 R1.1 R2.1 | length 51.1
  Top Layer w0.1: v1(39.599,73.711) 38.405,74.905 38.405,85.979 38.819,86.393 I1.4 ; v1(49.022,73.711) 49.022,73.113 51.44,70.695 52.038,70.695 53.759,68.974 53.759,68.834 54.054,68.539 54.054,68.503 54.737,67.82 54.737,62.028 R1.1 ; 59.944,73.711 59.969,73.686 R2.1
  Bottom Layer w0.1: v1(39.599,73.711) v1(49.022,73.711) 59.944,73.711
GPIO1: I1.5 P2.4 | length 72.7
  Top Layer w0.1: I1.5 41.607,85.593 41.969,85.955 42.269,85.955 42.313,85.999 42.583,85.999 42.667,85.915 42.667,85.852 42.926,85.593 43.282,85.593 v1(44.191,84.684) ; v1(62.833,83.014) 62.833,65.375 63.322,64.886 63.322,43.913 63.235,43.826 63.235,36.206 P2.4
  Bottom Layer w0.1: v1(44.191,84.684) 45.08,83.795 62.052,83.795 v1(62.833,83.014)
GPIO2: D8.2 I1.6 P2.5 | length 83
  Top Layer w0.1: I1.6 39.395,84.793 39.395,83.82 39.675,83.541 39.878,83.541 40.31,83.109 40.31,82.296 39.878,81.864 39.726,81.864 39.395,81.534 39.395,80.772 39.776,80.391 46.99,80.391 48.802,78.579 48.802,77.493 48.656,77.347 48.656,71.458 50.343,69.772 v1(50.343,55.956) ; v1(62.992,49.657) 62.992,34.544 63.246,34.29 64.694,34.29 64.948,34.544 64.948,37.033 P2.5
  Bottom Layer w0.1: v1(50.343,55.956) 56.871,55.956 56.972,55.855 56.972,54.864 56.642,54.534 54.686,54.534 54.1,53.948 D8.2 55.842,51.6 57.201,50.241 62.408,50.241 v1(62.992,49.657)
GPIO3: I1.7 P2.6 | length 71.2
  Top Layer w0.1: I1.7 40.661,83.993 v1(42.494,85.827) ; P2.6 65.501,41.752 v1(65.501,83.774)
  Bottom Layer w0.1: v1(42.494,85.827) 59.792,85.827 60.579,85.039 64.237,85.039 v1(65.501,83.774)
GPIO4: I1.8 P2.7 | length 68.1
  Top Layer w0.1: v1(39.116,81.857) 39.116,82.939 39.37,83.193 I1.8 ; P2.7 65.035,43.826 65.035,68.161 64.948,68.248 v1(64.948,82.22)
  Bottom Layer w0.1: v1(39.116,81.857) 50.859,81.857 51.471,82.469 52.456,82.469 53.086,81.839 63.148,81.839 63.529,82.22 v1(64.948,82.22)
GPIO5: I1.9 P2.8 | length 72.2
  Top Layer w0.1: v1(39.294,81.432) 39.294,82.317 39.37,82.393 I1.9 ; P2.8 64.135,44.234 63.335,43.434 63.335,42.418 63.627,42.126 64.783,42.126 65.135,42.478 65.135,81.766 v1(65.075,81.826)
  Bottom Layer w0.1: v1(39.294,81.432) 63.348,81.432 63.741,81.826 v1(65.075,81.826)
GPIO6: I1.10 P2.9 | length 55.3
  Top Layer w0.1: I1.10 48.683,81.593 49.377,80.899 49.911,80.899 50.546,80.264 50.546,75.844 50.8,75.59 54.635,75.59 56.007,74.219 56.007,52.603 55.982,52.578 v1(55.982,49.53)
  Bottom Layer w0.1: v1(55.982,49.53) 62.611,49.53 P2.9
GPIO7: I1.11 P2.10 | length 49.3
  Top Layer w0.1: I1.11 47.879,80.793 48.902,79.77 48.902,74.314 51.516,71.7 51.516,71.095 51.816,70.795 52.159,70.795 54.154,68.799 54.154,68.603 54.839,67.919 v1(54.839,52.883)
  Bottom Layer w0.1: v1(54.839,52.883) 57.175,50.546 P2.10
GPIO8: I1.12 P2.11 | length 48.6
  Top Layer w0.1: v1(39.268,77.368) 39.268,79.891 39.37,79.993 I1.12 ; v1(58.496,58.725) v1(58.496,71.933)
  Bottom Layer w0.1: v1(39.268,77.368) 39.268,72.644 39.37,72.542 46.514,72.542 57.843,72.586 v1(58.496,71.933) ; v1(58.496,58.725) P2.11
GPIO9: I1.13 P2.12 | length 42.5
  Top Layer w0.1: I1.13 42.164,79.193 42.418,78.939 42.418,76.683 v1(46.939,72.161)
  Bottom Layer w0.1: v1(46.939,72.161) 56.337,72.161 58.42,70.079 61.804,70.079 62.89,68.992 62.89,56.871 P2.12
GPIO10: I1.14 P2.13 | length 41.7
  Top Layer w0.1: v1(40.552,73.127) 40.559,74.485 40.552,75.135 I1.14 ; v1(63.183,70.091) 63.183,65.506 64.935,63.754 64.935,58.966 P2.13
  Bottom Layer w0.1: v1(40.552,73.127) 60.147,73.127 v1(63.183,70.091)
GPIO11: I1.15 P2.14 | length 37.8
  Top Layer w0.1: I1.15 41.352,72.821 v1(42.266,71.907)
  Bottom Layer w0.1: v1(42.266,71.907) 46.03,71.907 46.609,72.486 56.292,72.486 57.531,71.247 61.087,71.247 63.017,69.317 63.017,61.824 P2.14
GPIO12: I1.16 P2.15 | length 33.2
  Top Layer w0.1: I1.16 42.152,74.93 v1(44.286,72.796)
  Bottom Layer w0.1: v1(44.286,72.796) 60.3,72.796 63.023,70.073 63.023,69.474 63.144,69.352 63.144,64.237 P2.15
GPIO13: I1.17 P2.16 | length 35.5
  Top Layer w0.1: I1.17 42.952,78.995 v1(43.256,79.299) ; v1(63.335,79.299) 63.335,70.548 63.5,70.383 63.5,69.774 63.335,69.609 63.335,66.586 P2.16
  Bottom Layer w0.1: v1(43.256,79.299) v1(63.335,79.299)
GPIO14: I1.18 P2.17 | length 28.8
  Top Layer w0.1: v1(43.752,76.098) I1.18
  Bottom Layer w0.1: v1(43.752,76.098) 44.594,75.256 62.941,75.256 62.971,75.226 62.971,70.899 64.135,69.735 P2.17
GPIO15: I1.19 P2.18 | length 26.1
  Top Layer w0.1: I1.19 44.552,78.359 44.679,78.486 v1(45.974,78.486)
  Bottom Layer w0.1: v1(45.974,78.486) 48.311,76.149 62.586,76.149 64.948,73.787 64.948,71.679 P2.18
GPIO16: I1.20 P2.19 | length 22.6
  Top Layer w0.1: v1(45.352,75.59) I1.20
  Bottom Layer w0.1: v1(45.352,75.59) 62.967,75.59 64.135,74.422 P2.19
GPIO17: I1.21 P2.20 | length 23
  Top Layer w0.1: I1.21 46.152,78.13 v1(47.041,79.019)
  Bottom Layer w0.1: v1(47.041,79.019) 63.373,79.019 63.652,79.299 64.643,79.299 64.948,78.994 64.948,77.876 64.135,77.064 P2.20
GPIO18: I1.22 P2.21 | length 17.8
  Top Layer w0.1: I1.22 46.952,78.397 v1(47.244,78.689)
  Bottom Layer w0.1: v1(47.244,78.689) 63.932,78.689 P2.21
GPIO21: I1.25 P1.19 | length 27.4
  Top Layer w0.1: v1(48.971,80.621) 49.352,80.24 I1.25
  Bottom Layer w0.1: P1.19 29.159,73.533 36.247,80.621 v1(48.971,80.621)
GPIO26: I1.26 P1.18 | length 34.7
  Top Layer w0.1: I1.26 50.152,73.571 52.908,70.815 v1(52.908,70.307)
  Bottom Layer w0.1: P1.18 27.991,70.307 v1(52.908,70.307)
GPIO33: I1.28 P1.17 | length 32.9
  Top Layer w0.1: v1(50.941,79.869) 51.333,79.477 51.333,79.193 I1.28
  Bottom Layer w0.1: P1.17 26.405,69.353 26.405,71.773 26.67,72.038 29.358,72.038 37.364,80.043 48.346,80.043 48.52,79.869 v1(50.941,79.869)
GPIO34: I1.29 P1.16 | length 39.3
  Top Layer w0.1: P1.16 27.305,66.74 26.405,67.64 26.405,76.367 26.924,76.886 30.277,76.886 v1(31.471,75.692) ; v1(50.825,80.586) 50.825,80.518 51.35,79.993 I1.29
  Bottom Layer w0.1: v1(31.471,75.692) 36.297,80.518 48.392,80.518 48.681,80.229 50.026,80.229 50.383,80.586 v1(50.825,80.586)
GPIO35: I1.31 P1.15 | length 40.6
  Top Layer w0.1: P1.15 28.105,64.173 28.105,66.294 26.505,67.894 26.505,71.374 28.118,72.987 v1(28.118,74.199) ; I1.31 51.816,81.593 51.816,81.864 v1(52.095,82.144)
  Bottom Layer w0.1: v1(28.118,74.199) 29.596,74.199 31.14,75.819 31.378,76.017 36.723,81.362 38.608,81.362 38.964,81.757 51.608,81.757 51.994,82.144 v1(52.095,82.144)
GPIO36: I1.32 P1.14 | length 41.1
  Top Layer w0.1: v1(32.563,66.091) v1(32.563,76.643) ; v1(51.537,81.178) 51.181,81.534 51.181,82.329 51.244,82.393 I1.32
  Bottom Layer w0.1: P1.14 v1(32.563,66.091) ; v1(32.563,76.643) 36.286,80.366 48.348,80.366 48.644,80.069 50.034,80.069 50.451,80.486 51.25,80.486 51.537,80.772 v1(51.537,81.178)
GPIO37: I1.33 P1.13 | length 55.9
  Top Layer w0.1: v1(49.886,80.569) 49.886,73.66 51.638,71.907 v1(51.638,71.12) ; v1(50.19,80.874) 50.19,83.109 50.546,83.464 50.833,83.464 51.105,83.193 I1.33
  Bottom Layer w0.1: P1.13 26.492,59.106 26.492,64.008 27.508,65.024 27.864,65.024 28.118,65.278 28.118,69.342 27.686,69.774 26.835,69.774 26.505,70.104 26.505,71.387 26.924,71.806 27.686,71.806 28.118,71.374 28.118,71.12 28.321,70.917 35.281,70.917 35.484,71.12 v1(51.638,71.12) ; v1(49.886,80.569) v1(50.19,80.874)
GPIO38: I1.34 P1.12 | length 49.1
  Top Layer w0.1: P1.12 28.372,56.82 v1(28.372,71.476) ; I1.34 52.121,83.993 52.121,82.672 52.652,82.141 v1(52.652,79.584)
  Bottom Layer w0.1: v1(28.372,71.476) 29.016,71.476 37.423,79.883 48.328,79.883 48.627,79.584 v1(52.652,79.584)
GPIO39: I1.35 P1.11 | length 63.2
  Top Layer w0.1: P1.11 25.786,54.732 25.786,86.314 27.813,88.341 v1(38.024,88.341) ; v1(50.394,87.376) 50.394,85.09 50.691,84.793 I1.35
  Bottom Layer w0.1: v1(38.024,88.341) 49.428,88.341 v1(50.394,87.376)
GPIO40: I1.36 P1.10 | length 68.5
  Top Layer w0.1: v1(26.111,84.506) 26.162,84.455 26.162,54.534 27.737,54.483 28.118,54.102 28.118,51.486 P1.10 ; v1(51.102,89.306) 51.002,89.206 51.002,85.825 51.234,85.593 I1.36
  Bottom Layer w0.1: v1(26.111,84.506) 26.111,86.893 26.416,87.198 30.099,87.198 32.207,89.306 v1(51.102,89.306)
GPIO41: I1.37 P1.9 | length 72.6
  Top Layer w0.1: v1(25.933,89.662) 25.686,89.415 25.686,49.752 P1.9 ; I1.37 52.121,86.393 52.674,86.947 52.674,88.9 v1(51.912,89.662)
  Bottom Layer w0.1: v1(25.933,89.662) v1(51.912,89.662)
GPIO42: I1.38 P1.8 | length 73.7
  Top Layer w0.1: P1.8 25.586,47.312 25.586,89.899 25.857,90.17 33.579,90.17 v1(34.696,89.052) ; v1(51.59,88.494) 51.59,88.272 51.202,87.884 51.202,87.193 I1.38
  Bottom Layer w0.1: v1(34.696,89.052) 50.597,89.052 51.156,88.494 v1(51.59,88.494)
GPIO45: I1.41 P1.5 | length 75.4
  Top Layer w0.1: P1.5 28.524,37.973 28.924,38.373 28.924,76.453 v1(28.905,76.472) ; I1.41 50.952,89.84 52.07,89.84 52.874,89.035 v1(52.874,82.702)
  Bottom Layer w0.1: v1(28.905,76.472) 31.514,76.472 34.566,79.524 34.566,79.807 37.461,82.702 v1(52.874,82.702)
GPIO46: I1.44 P1.4 | length 71
  Top Layer w0.1: P1.4 29.743,37.871 v1(29.743,76.117) ; v1(48.539,82.271) 48.552,82.283 I1.44
  Bottom Layer w0.1: v1(29.743,76.117) 31.337,76.117 34.695,79.476 34.695,79.712 37.254,82.271 v1(48.539,82.271)
GPIO47: I1.27 P1.23 | length 35.3
  Top Layer w0.1: I1.27 50.952,78.181 52.908,78.181 53.213,78.486 v1(53.213,82.194)
  Bottom Layer w0.1: P1.23 29.058,83.693 31.344,81.407 33.553,81.407 33.934,81.788 35.509,83.414 53.086,83.414 53.416,83.083 53.416,82.398 v1(53.213,82.194)
GPIO48: I1.30 P1.22 | length 26.9
  Top Layer w0.1: v1(50.525,83.033) 50.525,81.512 51.244,80.793 I1.30
  Bottom Layer w0.1: P1.22 33.884,81.153 35.763,83.033 v1(50.525,83.033)
NetC10_2: C10.2 R13.1 U1.11 | length 82.5
  Top Layer w0.1: R13.1 38.1,68.575 ; v1(40.31,74.473) 40.31,73.431 40.227,73.349 40.227,72.828 41.58,71.476 41.58,68.834 41.321,68.575 38.1,68.575 ; U1.11 46.914,40.021 46.914,38.862 46.66,38.608 42.545,38.608 41.58,39.573 41.58,44.883 38.557,47.905 38.557,68.118 38.1,68.575 ; v1(59.03,74.473) v1(59.03,86.279)
  Bottom Layer w0.1: v1(40.31,74.473) v1(59.03,74.473) ; C10.2 56.236,86.729 56.554,86.411 58.092,86.411 58.224,86.279 v1(59.03,86.279)
NetC11_2: C11.2 C12.2 R13.2 R14.1 U1.10 U1.20 | length 90.6
  Top Layer w0.1: R13.2 38.202,70.155 v1(38.76,70.714) ; U1.10 46.085,39.548 43.129,39.548 42.799,39.878 42.799,42.52 43.18,42.901 44.085,42.901 U1.20 44.085,47.65 44.729,48.295 44.729,53.848 45.075,54.193 45.695,54.193 45.798,54.09 49.751,54.09 51.206,55.545 51.206,59.309 54.194,62.297 R14.1 ; v1(53.035,69.545) 53.035,66.767 v1@53.34,66.462 ; v1(53.34,66.7) v1@53.34,66.462 ; v1(58.039,68.732) 58.039,72.949 58.705,73.614 58.705,86.518 59.055,86.868 v1(59.055,87.935) ; v1@53.34,66.462 54.194,65.608 R14.1 ; v1@53.34,66.462 53.34,64.893 53.594,64.639 R14.1
  Bottom Layer w0.1: v1(38.76,70.714) 52.934,70.714 53.289,70.358 53.289,69.799 v1(53.035,69.545) ; v1(53.34,66.7) 55.372,68.732 v1(58.039,68.732) ; C11.2 57.836,86.868 57.975,86.729 C12.2 59.055,87.11 v1(59.055,87.935)
NetD7_2: D7.2 R25.1 | length 10.3
  Top Layer w0.1: v1(35.712,53.238) 35.712,59.944 35.989,60.221 R25.1
  Bottom Layer w0.1: v1(35.712,53.238) 36.5,52.451 D7.2
NetD8_1: D8.1 R26.1 | length 25.9
  Top Layer w0.1: R26.1 60.706,68.276 60.953,68.029 60.953,50.069 v1(60.884,50)
  Bottom Layer w0.1: D8.1 v1(60.884,50)
NetJ1_A5: J1.A5 R4.1 | length 56.8
  Top Layer w0.1: v1(36.984,71.577) R4.1 ; v1(54.991,71.577) 55.9,70.668 55.9,53.345 55.575,53.02 55.575,46.029 55.773,45.831 55.773,35.606 55.269,35.101 J1.A5
  Bottom Layer w0.1: v1(36.984,71.577) v1(54.991,71.577)
NetJ1_B5: J1.B5 R5.1 | length 19.2
  Top Layer w0.1: R5.1 51.308,38.202 52.908,36.601 52.908,33.579 52.857,33.528 52.857,33.147 52.883,33.122 52.883,32.258 53.162,31.979 56.278,31.979 J1.B5
NetJ2_A5: J2.A5 R6.1 | length 37.3
  Top Layer w0.1: J2.A5 v1(34.9,45.237) ; v1(49.809,50.038) 49.809,52.787 52.832,55.81 R6.1
  Bottom Layer w0.1: v1(34.9,45.237) 44.45,45.237 44.755,45.542 44.755,48.514 46.279,50.038 v1(49.809,50.038)
NetJ2_B5: J2.B5 R7.1 | length 27
  Top Layer w0.1: J2.B5 36.918,32.004 38.551,32.004 38.805,32.258 38.805,33.407 38.76,33.452 38.76,35.814 39.116,36.17 39.116,41.808 37.338,43.586 R7.1
NetQ1_2: Q1.2 R23.1 | length 50.1
  Top Layer w0.1: R23.1 54.864,68.703 54.991,68.576 v1(54.991,63.932)
  Bottom Layer w0.1: Q1.2 30.48,51.87 30.226,52.124 30.226,53.289 29.388,54.127 26.416,54.127 26.035,54.508 26.035,56.388 26.289,56.642 27.508,56.642 28.524,57.658 28.524,60.96 28.956,61.392 35.611,61.392 36.22,60.782 40.234,60.782 40.513,60.503 51.562,60.503 v1(54.991,63.932)
NetQ2_2: Q2.2 R24.1 | length 13.9
  Top Layer w0.1: R24.1 59.99,63.098 60.528,62.56 v1(60.528,52.4)
  Bottom Layer w0.1: Q2.2 v1(60.528,52.4)
NetR8_1: R8.1 U1.15 | length 39.4
  Top Layer w0.1: U1.15 48.523,42.021 48.92,42.418 v1(48.92,45.517) ; R8.1 54.3,71.608 55.626,70.282 55.626,53.264 55.448,53.086 v1(55.448,45.517)
  Bottom Layer w0.1: v1(48.92,45.517) v1(55.448,45.517)
NetR9_1: R9.1 R10.1 U1.16 | length 47.1
  Top Layer w0.1: v1(30.074,55.093) 30.074,65.618 31.015,66.56 R10.1 ; v1(45.212,53.772) 47.752,53.772 48.158,53.365 48.158,52.553 46.888,51.283 46.888,47.117 ; U1.16 46.085,46.06 46.888,46.863 46.888,47.117 ; R9.1 49.53,47.053 46.888,47.117
  Bottom Layer w0.1: v1(30.074,55.093) 43.891,55.093 v1(45.212,53.772)
NetR11_1: R11.1 U1.8 | length 38.4
  Top Layer w0.1: v1(30.734,60.173) 30.734,62.845 31.015,63.126 R11.1 ; v1(38.354,60.173) 38.405,60.122 v1(38.405,47.295) ; v1(40.919,46.228) 41.961,45.187 41.961,39.649 42.24,39.37 45.085,39.37 U1.8
  Bottom Layer w0.1: v1(30.734,60.173) v1(38.354,60.173) ; v1(38.405,47.295) 39.472,46.228 v1(40.919,46.228)
NetR12_1: R12.1 U1.9 | length 9.4
  Top Layer w0.1: U1.9 45.585,38.735 46.05,38.735 46.431,39.116 46.431,43.104 47.879,44.552 R12.1
"RTS FTDI": Q1.3 R24.2 U1.19 | length 53.4
  Top Layer w0.1: v1(44.425,45.497) 44.425,44.128 44.585,43.967 ; U1.19 44.585,43.967 ; v1(45.144,45.263) 44.585,44.704 44.585,43.967 ; R24.2 60.528,65.665 60.853,65.34 60.853,52.166 60.554,51.867 v1(60.554,49.2)
  Bottom Layer w0.1: Q1.3 32.893,50.6 32.893,49.174 36.043,46.025 40.066,46.025 40.594,45.497 v1(44.425,45.497) ; v1(45.144,45.263) 46.515,46.634 57.099,46.634 59.665,49.2 v1(60.554,49.2)
"RXD FTDI": R18.2 U1.1 | length 36.6
  Top Layer w0.1: U1.1 43.434,42.021 43.434,42.088 44.45,42.088 44.704,42.342 v1(44.704,43.028) ; R18.2 59.99,60.884 60.198,60.676 v1(60.198,43.028)
  Bottom Layer w0.1: v1(44.704,43.028) v1(60.198,43.028)
"TXD FTDI": R17.2 U1.17 | length 5.7
  Top Layer w0.1: U1.17 45.585,48.096 R17.2
U0RXD: I1.40 P1.6 R17.1 | length 93.3
  Top Layer w0.1: P1.6 28.448,41.656 v1(28.448,44.907) ; R17.1 v1(46.101,47.549) ; I1.40 51.202,88.793 51.202,88.443 51.102,88.343 51.102,86.591 51.562,86.131 51.943,86.131 52.222,85.852 52.222,82.979 ; v1(56.312,47.549) v1(56.312,50.47) 56.312,79.721 ; 52.222,82.979 52.222,82.804 52.502,82.525 52.677,82.525 ; 52.222,82.979 52.677,82.525 ; 52.677,82.525 53.518,82.525 56.312,79.731 56.312,79.721 ; 52.677,82.525 52.779,82.423 52.982,82.423 53.062,82.503 53.53,82.503 56.312,79.721
  Bottom Layer w0.1: v1(28.448,44.907) 44.457,44.907 44.856,45.307 44.856,47.244 45.161,47.549 v1(46.101,47.549) 50.394,47.549 ; v1(56.312,47.549) 50.394,47.549 ; v1(56.312,50.47) 53.315,50.47 50.394,47.549
U0TXD: I1.39 P1.7 R18.1 | length 83.9
  Top Layer w0.1: I1.39 51.936,87.993 v1(52.349,87.579) ; v1(59.38,87.762) 59.411,87.732 59.411,60.021 R18.1 v1(59.99,48.865)
  Bottom Layer w0.1: P1.7 27.305,44.196 27.915,44.806 28.037,44.806 28.194,44.649 28.689,44.649 28.846,44.806 55.931,44.806 v1(59.99,48.865) ; v1(52.349,87.579) 55.982,87.579 56.679,88.276 58.988,88.276 59.38,87.884 v1(59.38,87.762)
pads on no net: I1.55_1 I1.55_2 I1.55_3 I1.55_4 I1.55_5 I1.55_6 I1.55_7 I1.55_8 I1.55_9 J1. J1.A2 J1.A3 J1.A8 J1.A10 J1.A11 J1.B2 J1.B3 J1.B8 J1.B10 J1.B11 J1.SH5 J1.SH6 J2. J2.A2 J2.A3 J2.A8 J2.A10 J2.A11 J2.B2 J2.B3 J2.B8 J2.B10 J2.B11 J2.SH5 J2.SH6 P2.24 U1.2 U1.4 U1.5 U1.6 U1.7 U1.14

## Other copper
Top Layer:
  text "OMAR" at 42.927,30.472 h1.52